# Altium PCB microSDAdaptor.PcbDoc
Units mil, origin at the board's own origin, x right, y up, seen from the top; angles counter-clockwise.
Board outline 675 x 1055 mil, 2 copper layers (Top Layer, Bottom Layer); 2 components, 6 nets, 15 pads, 0 vias.
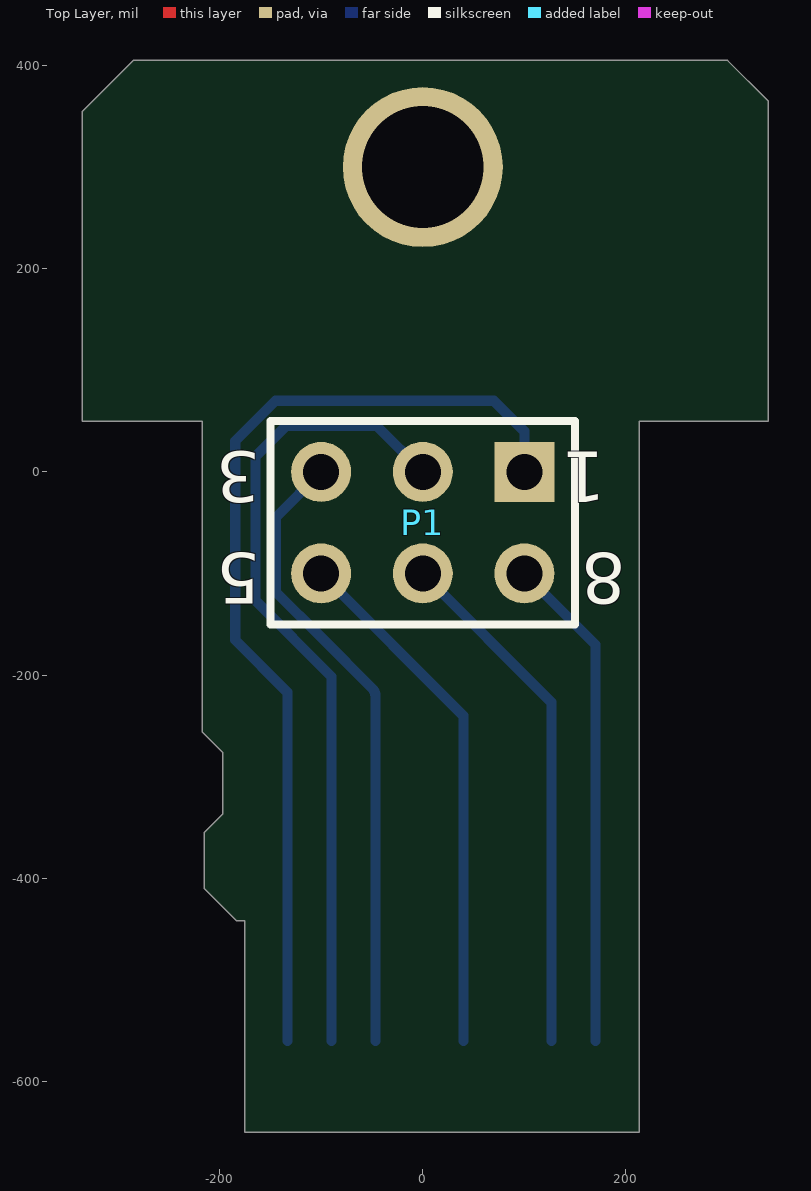
[diagram p0: Top Layer view]
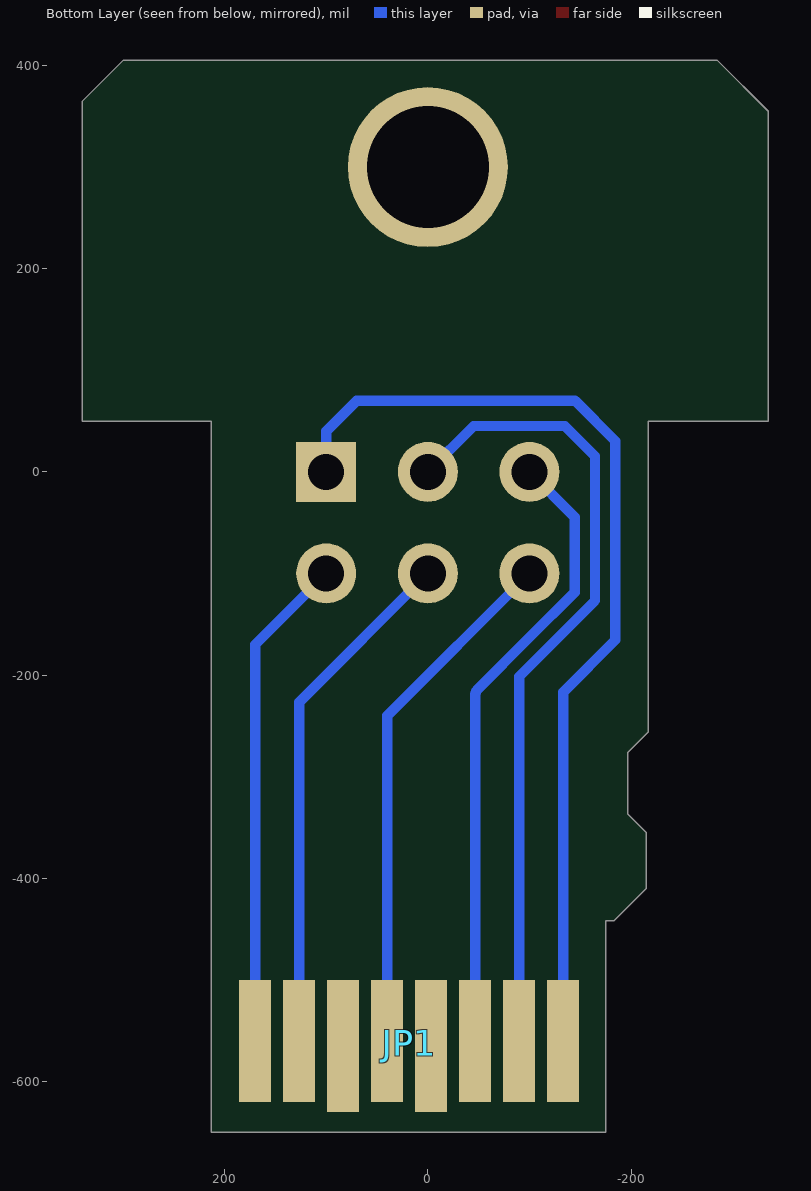
[diagram p1: Bottom Layer view, seen from below]

## Layer stack, top to bottom
Top Solder: solder mask 0.4, Solder Resist, Dk 3.5
Top Layer: signal copper 1.4
Dielectric 1: dielectric 12.6, FR-4, Dk 4.8
Bottom Layer: signal copper 1.4
Bottom Solder: solder mask 0.4, Solder Resist, Dk 3.5

## Board outline
-215,-370 -215,-355 -197,-337 -197,-276 -217,-256 -217,50 -335,50 -335,355 -285,405 300,405 340,365 340,50 213,50 213,-650 -175,-650 -175,-442 -183,-442 -215,-410

## Design rules (kind name [scope] priority, off if disabled: settings)
Clearance [All] p1: gap=10 ignorepadtopadclearanceinfootprint=FALSE except(0: Arc-Hole Track-Hole SMDPad-Hole THPad-Hole Via-Hole Fill-Hole Poly-Hole Region-Hole Text-Hole)
PolygonConnect [All] p1: connectstyle=Relief reliefconductorwidth=10 reliefentries=4 polygonreliefangle="90 Angle" airgapwidth=10
RoutingVias [All] p1: holewidth=28 width=50 viastyle="Through Hole" minholewidth=28 minwidth=50 maxholewidth=28 maxwidth=50
SolderMaskExpansion [All] p1: expansion=4 istentingtop=FALSE
Width [All] p1: maxlimit=10 minlimit=10 preferedwidth=10
30 further rules are at their usual default settings.

## Components (designator, comment, footprint, x,y, rotation, side; value= is the part's Value field where it differs from the comment)
JP1 "microSDpads" microSDtabs -133.23,-560 r90 bottom
P1 "Header 3X2" HDR2X3 100,0 r180 top

## Footprints (in the part's own frame and the unit in brackets; to place one, negate y for a bottom-side part, rotate by r counter-clockwise, add the part's x,y. Pads: shape width x height; smd on the part's side, far side on the other; paste and mask are expansions set on the pad)
HDR2X3 [mm] "Connector; Header; 3x2 Position"
  rect 1.5x1.5 hole 0.9: 1(0,0)
  round 1.5 hole 0.9: 2(0,2.54) 3(2.54,0) 4(2.54,2.54) 5(5.08,0) 6(5.08,2.54)
  silkscreen extent -1.27,-1.27 6.35,3.81
microSDtabs [mm]
  rect 3.048x0.8 smd: 1(0,0) 2(0,1.1) 3(0,2.2) 5(0,4.4) 7(0,6.6) 8(0,7.7)
  rect 3.302x0.8 smd: 4(-0.127,3.3) 6(-0.127,5.5)

## Part data
JP1: Supplier Part Number 1=WM19081DKR-ND, Supplier 1=Digi-Key
P1: "Header, 3-Pin, Dual row", LatestRevisionDate=17-Jul-2002, LatestRevisionNote="Re-released for DXP Platform.", Publisher="Altium Limited"

## Free pads (board coordinates)
  round 157.48 hole 120: 0(0,300)

## Nets (pads, with @x,y where several pads share a name; then routed paths per layer and width w, separated by ;. In a path a pad name is that pad's centre, name@x,y a point inside that pad or via, vN(x,y) a via of type N, cw(c..) or ccw(c..) an arc to the next point about the centre after c; other vN are vias at no path point)
CORALSD1: JP1.1 P1.1 | length 965
  Bottom Layer w10: JP1.1 -133.23,-216.77 -184.53,-165.47 -184.53,30.47 -145,70 70,70 100,40 P1.1
CORALSD2: JP1.2 P1.3 | length 801.8
  Bottom Layer w10: JP1.2 -89.92,-201.33 -164.53,-126.73 -164.53,15.47 -135,45 -45,45 P1.3
CORALSD3: JP1.3 P1.5 | length 618.6
  Bottom Layer w10: P1.5 -144.53,-44.53 -144.53,-118.44 -99.57,-163.4 -49.52,-213.45 cw(c-56.61,-220.5) -46.61,-220.5 JP1.3
CORALSD5: JP1.5 P1.6 | length 531.3
  Bottom Layer w10: P1.6@-90.61,-90.61 P1.6 40,-240 JP1.5
CORALSD7: JP1.7 P1.4 | length 512.4
  Bottom Layer w10: P1.4 126.61,-226.61 JP1.7
CORALSD8: JP1.8 P1.2 | length 489
  Bottom Layer w10: P1.2 169.92,-169.92 JP1.8
pads on no net: JP1.4 JP1.6

## Silkscreen, mask and mechanical layers (free items; w line width, h text height)
Mechanical 1:
  the board outline again, w10

## Text inside footprints (layer, text, board x,y; h text height)
P1: Top Overlay "5" at -160,-80 h50 r180; Top Overlay "3" at -160,20 h50 r180; Top Overlay "8" at 200,-80 h50 r180; Top Overlay "1" at 180,20 h50 r180